# Altium PCB AlexaGoogleAssistant.PcbDoc
Units mil, origin at the board's own origin, x right, y up, seen from the top; angles counter-clockwise.
Board outline 3215 x 2894 mil, 2 copper layers (Top Layer, Bottom Layer); 47 components, 46 nets, 183 pads, 15 vias.
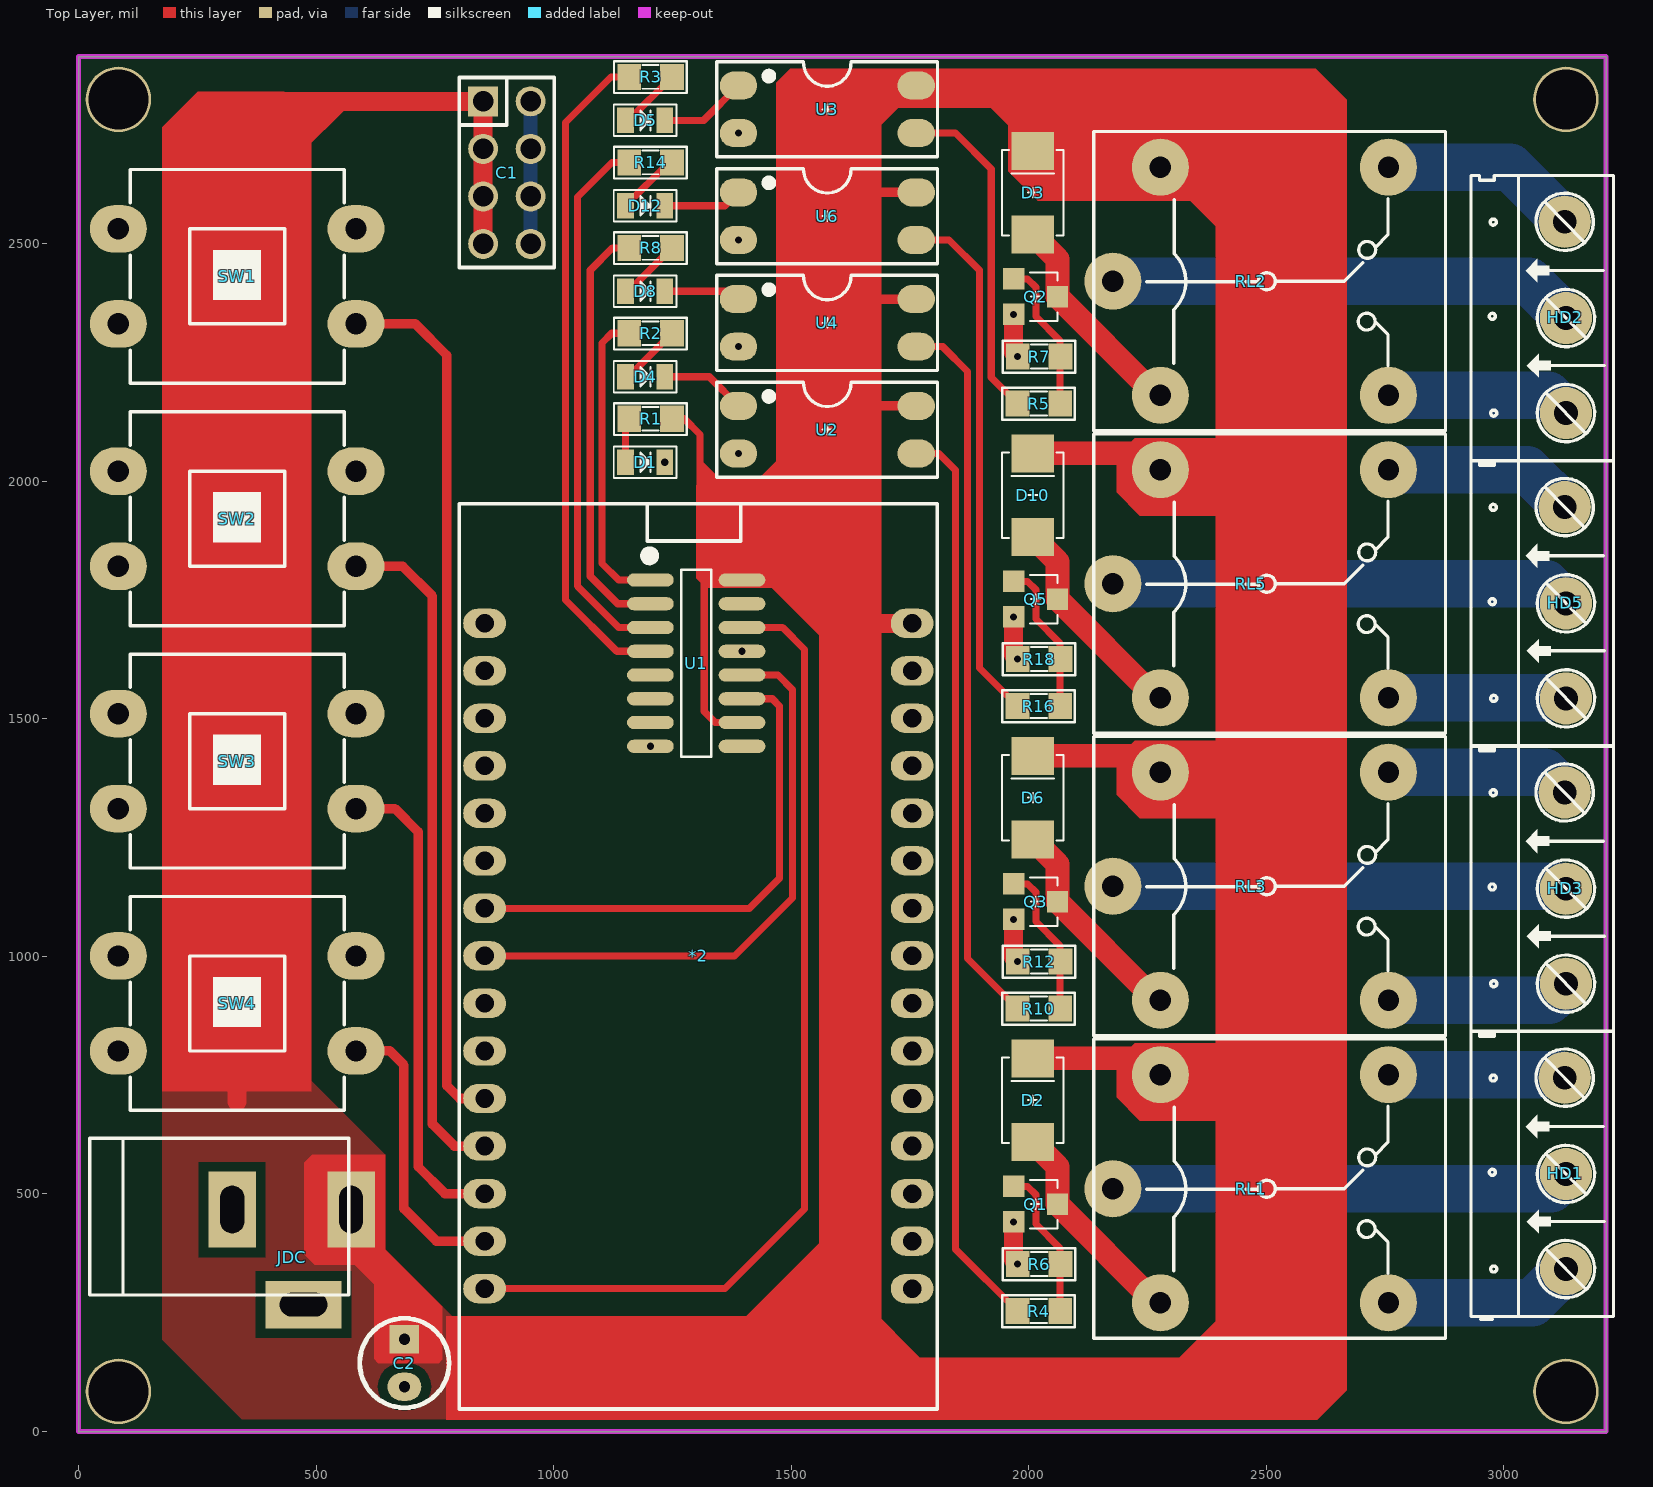
[diagram p0: Top Layer view]
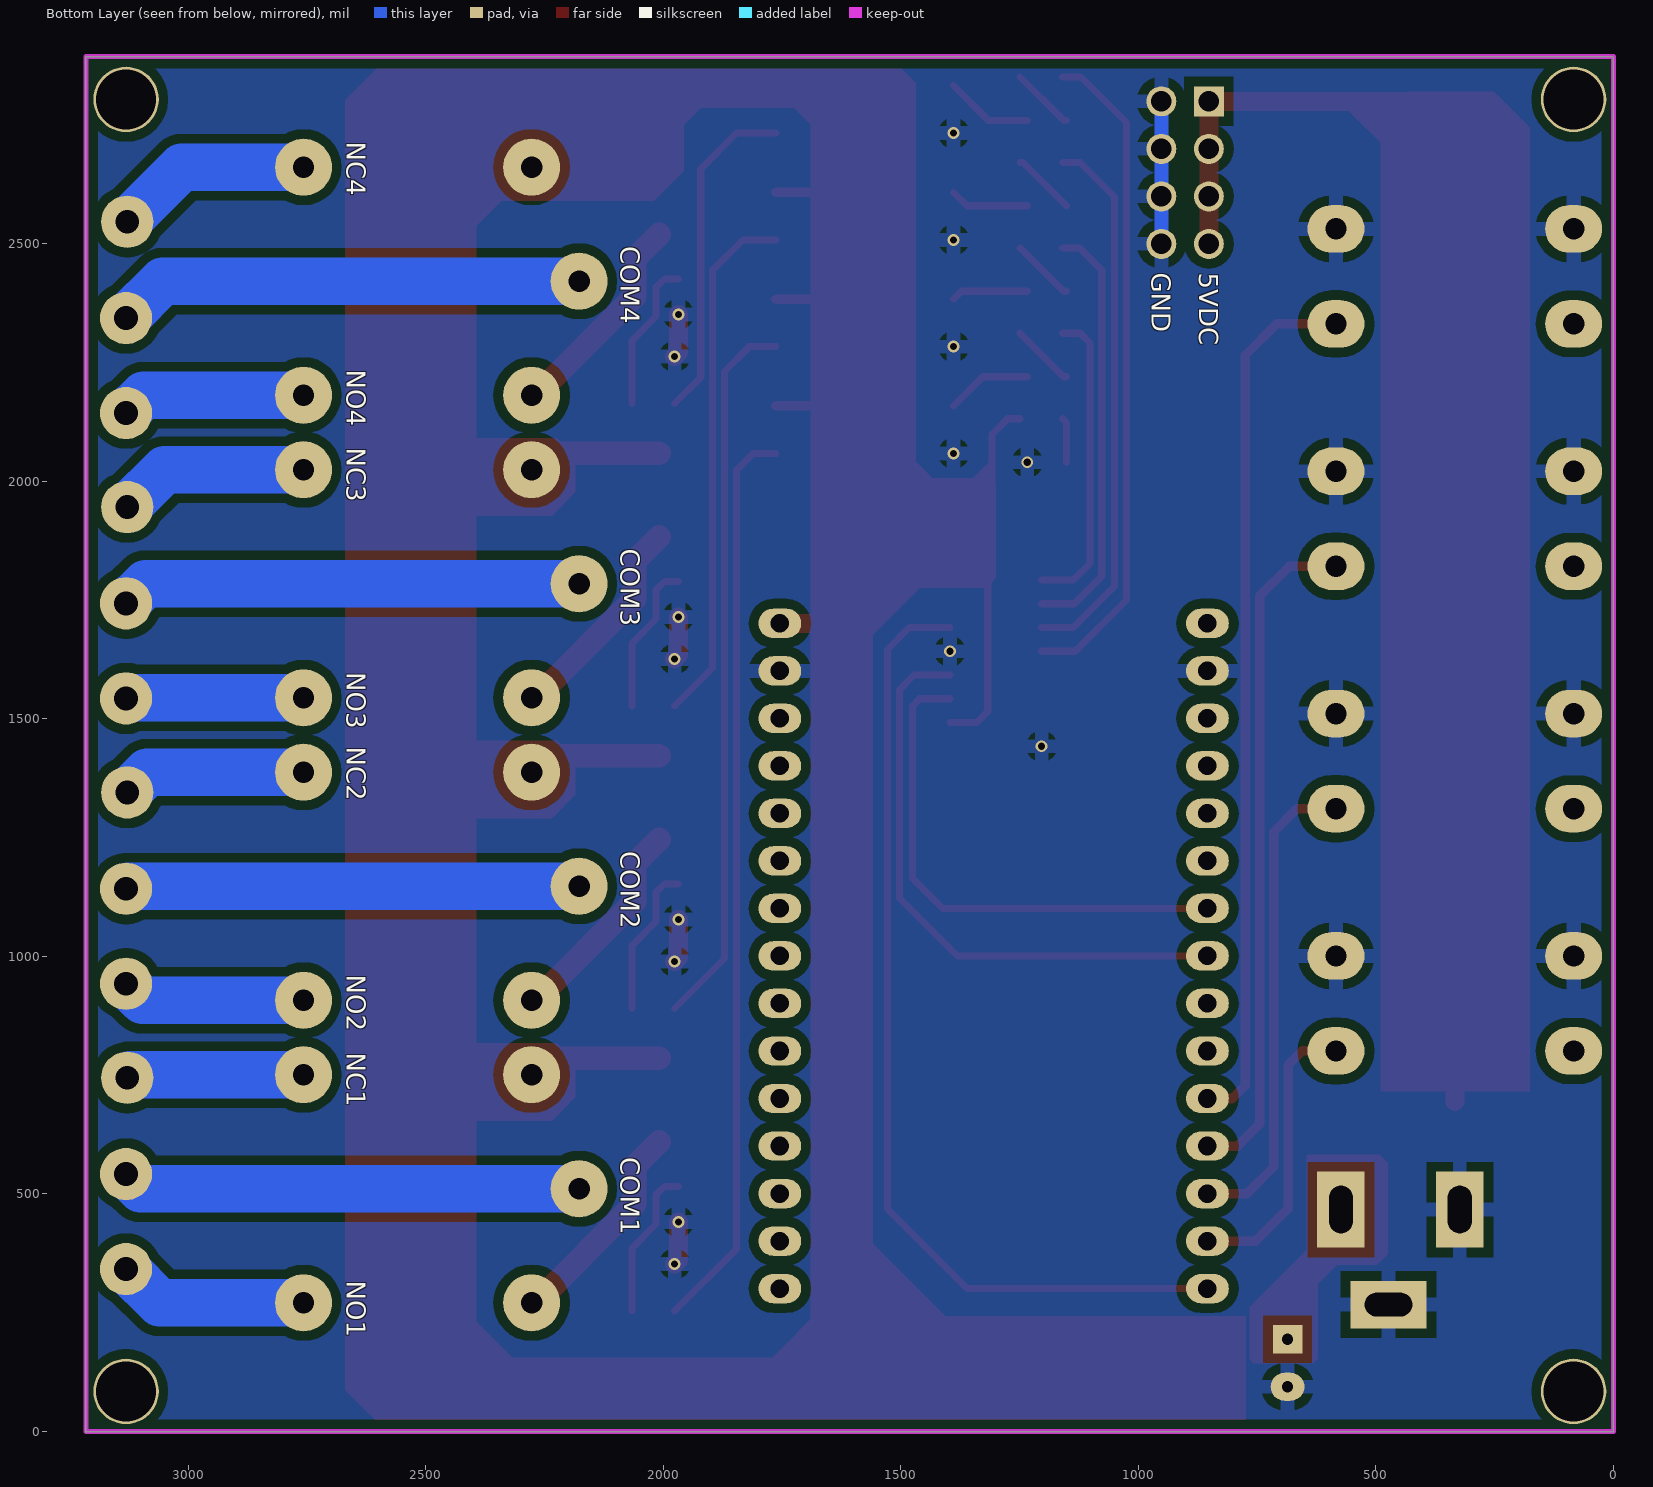
[diagram p1: Bottom Layer view, seen from below]
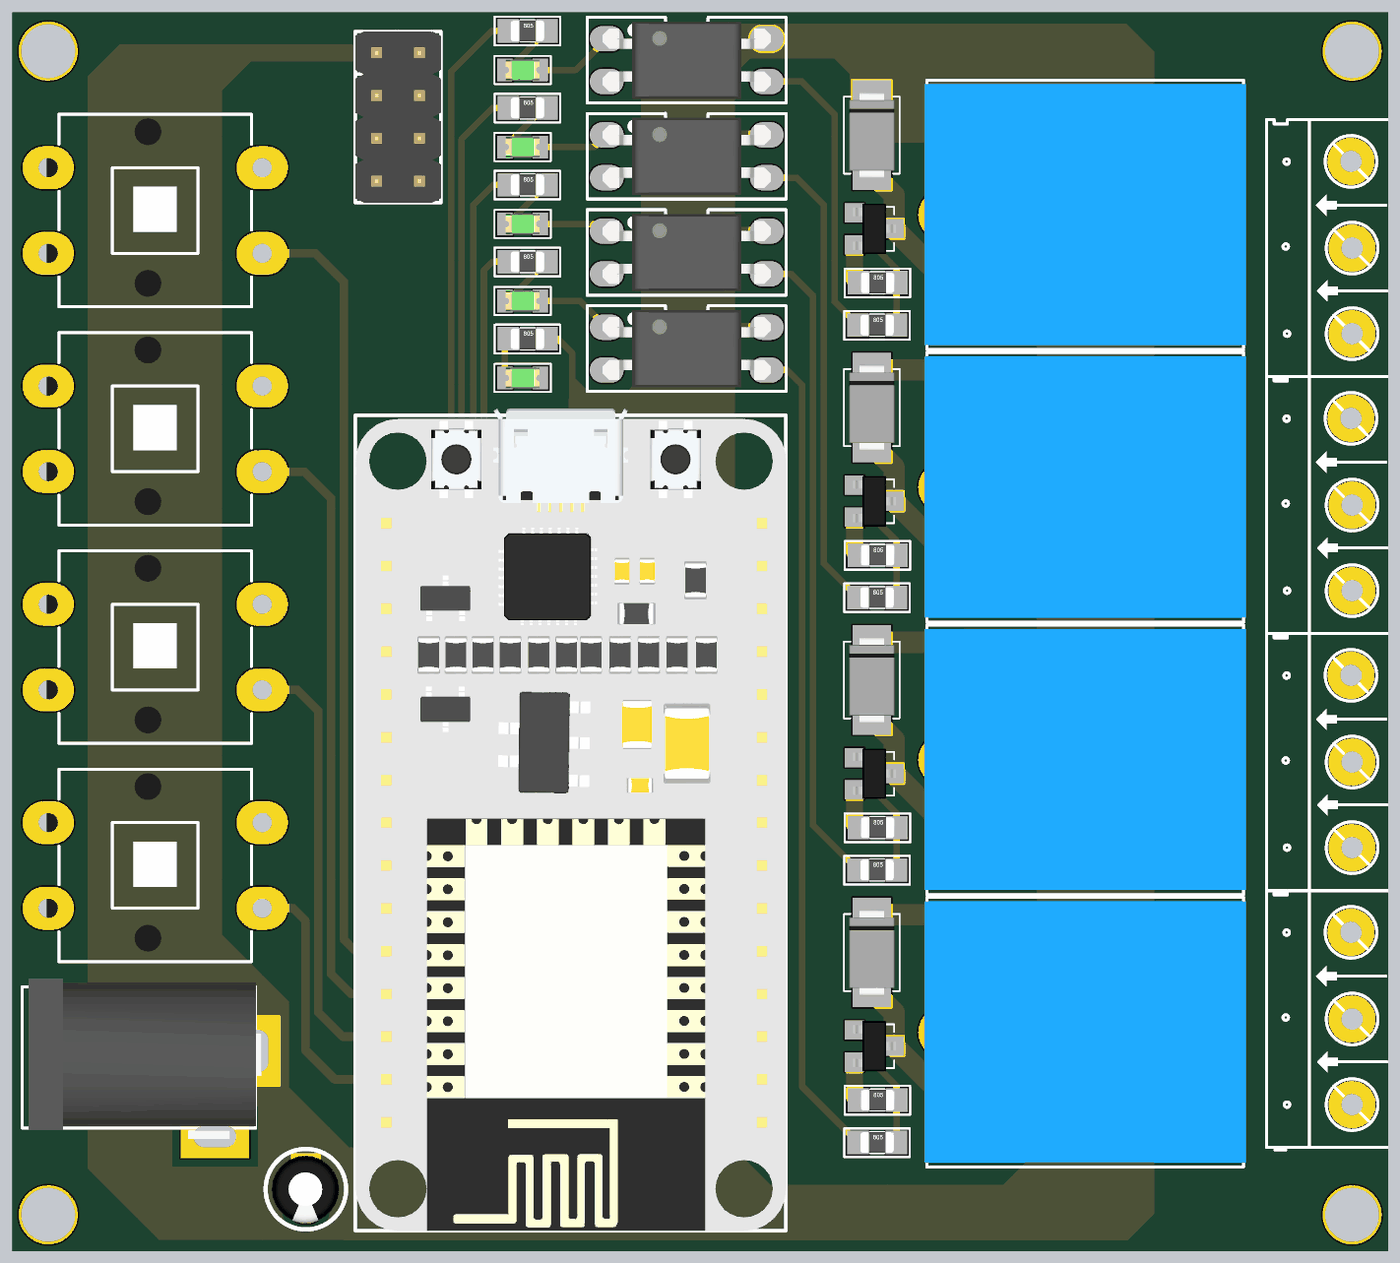
[diagram p2: 3D render of the assembled board from above, using the file's embedded part models]

## Layer stack, top to bottom
Top Solder: solder mask 0.4, Solder Resist, Dk 3.5
Top Layer: signal copper 1.4
Dielectric 1: dielectric 12.6, FR-4, Dk 4.8
Bottom Layer: signal copper 1.4
Bottom Solder: solder mask 0.4, Solder Resist, Dk 3.5

## Board outline
0,0 0,2894 3215,2894 3215,0

## Design rules (kind name [scope] priority, off if disabled: settings)
Clearance [All] p1: gap=10 ignorepadtopadclearanceinfootprint=FALSE except(0: Arc-Hole Track-Hole SMDPad-Hole THPad-Hole Via-Hole Fill-Hole Poly-Hole Region-Hole Text-Hole; 20: Arc-Fill Arc-Poly Arc-Region Track-Fill Track-Poly Track-Region SMDPad-Fill SMDPad-Poly SMDPad-Region THPad-Fill THPad-Poly THPad-Region Via-Fill Via-Poly Via-Region Fill-Fill Fill-Poly Fill-Region Poly-Poly Poly-Region Region-Region)
PlaneConnect [All] p1: planeconnectstyle=Relief reliefexpansion=20 reliefentries=4 reliefconductorwidth=30 reliefairgap=20
PolygonConnect [All] p1: connectstyle=Relief reliefconductorwidth=30 reliefentries=4 polygonreliefangle="90 Angle" airgapwidth=20
RoutingVias [All] p1: holewidth=28 width=50 viastyle="Through Hole" minholewidth=28 minwidth=50 maxholewidth=28 maxwidth=50
SolderMaskExpansion [All] p1: expansion=4
Width [All] p1: maxlimit=200 minlimit=10 preferedwidth=10
29 further rules are at their usual default settings.

## Components (designator, comment, footprint, x,y, rotation, side; value= is the part's Value field where it differs from the comment)
*2 "Module ESP8266 CP2102" "Module ESP8266 CP2102" 799.5,42.95 r0 top
C1 "JP4x2" JP4-D2T 901.5,2649.73 r270 top
C2 "10uF" CA-ALU-2.54 686,144.25 r270 top value=104
D1 "LED" LED_SMD_0805 1192.5,2040.1 r0 top
D2 "DIODE" "DO 214AC" 2008.5,697.5 r90 top
D3 "DIODE" "DO 214AC" 2008.5,2607.54 r90 top
D4 "LED" LED_SMD_0805 1192.5,2220 r0 top
D5 "LED" LED_SMD_0805 1192.5,2759.72 r0 top
D6 "DIODE" "DO 214AC" 2008.5,1334.18 r90 top
D8 "LED" LED_SMD_0805 1192.5,2399.91 r0 top
D10 "DIODE" "DO 214AC" 2008.5,1970.86 r90 top
D12 "LED" LED_SMD_0805 1192.5,2579.81 r0 top
HD1 "Header 3" HED3 3130.62,342 r90 top
HD2 "Header 3" HED3 3130.62,2143.57 r90 top
HD3 "Header 3" HED3 3130.62,942.52 r90 top
HD5 "Header 3" HED3 3130.62,1543.05 r90 top
JDC "Jac DC" DC-IN 448.5,367.25 r0 top
Q1 "C1815" SOT23 2014.26,478.6 r270 top
Q2 "C1815" SOT23 2014.26,2388.64 r270 top
Q3 "C1815" SOT23 2014.26,1115.28 r270 top
Q5 "C1815" SOT23 2014.26,1751.96 r270 top
R1 "470R" SM-RES-0805 1159,2131.55 r0 top value="R1/4W - 1K"
R2 "220R" SM-RES-0805 1159,2311.46 r0 top value="R1/4W - 1K"
R3 "220R" SM-RES-0805 1159,2851.17 r0 top value="R1/4W - 1K"
R4 "470R" SM-RES-0805 1976,253.6 r0 top value="R1/4W - 1K"
R5 "470R" SM-RES-0805 1976,2163.64 r0 top value="R1/4W - 1K"
R6 "10K" SM-RES-0805 1977,352.6 r0 top value="R1/4W - 1K"
R7 "10K" SM-RES-0805 1977,2262.64 r0 top value="R1/4W - 1K"
R8 "220R" SM-RES-0805 1159,2491.36 r0 top value="R1/4W - 1K"
R10 "470R" SM-RES-0805 1976,890.28 r0 top value="R1/4W - 1K"
R12 "10K" SM-RES-0805 1977,989.28 r0 top value="R1/4W - 1K"
R14 "220R" SM-RES-0805 1159,2671.26 r0 top value="R1/4W - 1K"
R16 "470R" SM-RES-0805 1976,1526.96 r0 top value="R1/4W - 1K"
R18 "10K" SM-RES-0805 1977,1625.96 r0 top value="R1/4W - 1K"
RL1 "Relay 10A/5V" RL_SPDT_10A 2177,511 r0 top value="Relay SPDT, 10A, 12V"
RL2 "Relay 10A/5V" RL_SPDT_10A 2177,2421.04 r0 top value="Relay SPDT, 10A, 12V"
RL3 "Relay 10A/5V" RL_SPDT_10A 2177,1147.68 r0 top value="Relay SPDT, 10A, 12V"
RL5 "Relay 10A/5V" RL_SPDT_10A 2177,1784.36 r0 top value="Relay SPDT, 10A, 12V"
SW1 "SW" SW4B 84,2331.25 r0 top value="Button chip 4 pin"
SW2 "SW" SW4B 84,1821.15 r0 top value="Button chip 4 pin"
SW3 "SW" SW4B 84,1311.05 r0 top value="Button chip 4 pin"
SW4 "SW" SW4B 84,800.95 r0 top value="Button chip 4 pin"
U1 "74HC595" SO-16-M 1300,1617.25 r270 top
U2 "PC817" PC817 1576,2108.6 r0 top
U3 "PC817" PC817 1576,2782.79 r0 top
U4 "PC817" PC817 1576,2333.33 r0 top
U6 "PC817" PC817 1576,2558.06 r0 top

## Footprints (in the part's own frame and the unit in brackets; to place one, negate y for a bottom-side part, rotate by r counter-clockwise, add the part's x,y. Pads: shape width x height; smd on the part's side, far side on the other; paste and mask are expansions set on the pad)
CA-ALU-2.54 [mm]
  rect 1.5x1.58 hole 0.6: 1(-1.27,0)
  oval 1.5x1.8 hole 0.6: 2(1.27,0)
  silkscreen extent -2.39,-2.39 2.39,2.39, body extent -2,-2.03 1.99,1.97, height 7.01
DC-IN [mil] "Jac DC input"
  rect 100x160 hole 50 slot 100 at 90 deg: 1(125,100) 2(-125,100)
  rect 160x100 hole 50 slot 100 at 0 deg: 3(25,-100)
  silkscreen extent -425,-80 120,250, body extent -410,-105 134,269, height 434
"DO 214AC" [mil]
  rect 80x90 smd: 1(-88,0) 2(88,0)
  silkscreen extent -90,-65 90,65, body extent -101,-53 100,52, height 85
HED3 [mil] "Header 3, 3 pin, hight 300mil, Pin to Pin 200, Colour Green"
  round 110 hole 50: 1(0,0) 2(200,0) 3(402.62,2.62)
  silkscreen extent -106,-100 500,200
JP4-D2T [mm] "8 pins, dual pin, straight, gold plating"
  rect 1.61x1.6 hole 1.1: 1(-3.81,-1.27)
  oval 1.61x1.6 hole 1.1: 2(-1.27,-1.27) 3(1.27,-1.27) 4(3.81,-1.27) 5(3.81,1.27) 6(1.27,1.27) 7(-1.27,1.27) 8(-3.81,1.27)
  silkscreen extent -5.08,-2.54 5.08,2.54, body extent -5.08,-2.54 5.08,2.54, height 8.55
LED_SMD_0805 [mm]
  rect 0.9x1.35 smd: 1(-1.05,0) 2(1.05,0)
  silkscreen extent -1.68,-0.84 1.68,0.84, body extent -1.01,-0.62 1.01,0.63, height 1.1
"Module ESP8266 CP2102" [mil]
  oval 90x62 hole 39: 1(55,1658) 2(55,1558) 3(55,1458) 4(55,1358) 5(55,1258) 6(55,1158) 7(55,1058) 8(55,958) 9(55,858) 10(55,758) 11(55,658) 12(55,558) 13(55,458) 14(55,358) 15(55,258) 16(955,1658) 17(955,1558) 18(955,1458) 19(955,1358) 20(955,1258) 21(955,1158) 22(955,1058) 23(955,958) 24(955,858) 25(955,758) 26(955,658) 27(955,558) 28(955,458) 29(955,358) 30(955,258)
  silkscreen extent 2,4 1008,1910, body extent 3,4 1009,1926, height 311
PC817 [mm]
  oval 2x1.5 smd: 1(-4.75,1.27) 2(-4.75,-1.27) 3(4.75,-1.27) 4(4.75,1.27)
  silkscreen extent -5.91,-2.54 5.89,2.55, body extent -5,-2.29 5,2.29, height 3.85
RL_SPDT_10A [mil] "Relay SPDT, 5 pin, 10A,W 650mil, L 800mil, H 800mil"
  round 120 hole 45: 1(0,0) 2(580,240) 3(580,-240) 4(100,-240) 5(100,240)
  silkscreen extent -40,-315 700,315, body extent -46,-304 706,306, height 602
SM-RES-0805 [mil]
  rect 50x55 smd: 1(0,0) 2(90,0)
  silkscreen extent -32,-34 121,33, body extent 6,-25 84,25, height 31
SO-16-M [mm] "74HC595;SOIC, 16-Leads, Body 9.9x3.9mm, Pitch 1.27mm, IPC Low Density"
  oval 0.7x2.5 smd: 1(-4.445,-2.45) 2(-3.175,-2.45) 3(-1.905,-2.45) 4(-0.635,-2.45) 5(0.635,-2.45) 6(1.905,-2.45) 7(3.175,-2.45) 8(4.445,-2.45) 9(4.445,2.45) 10(3.175,2.45) 11(1.905,2.45) 12(0.635,2.45) 13(-0.635,2.45) 14(-1.905,2.45) 15(-3.175,2.45) 16(-4.445,2.45)
  silkscreen extent -5.99,-2.74 5,0.8, body extent -5,-2.97 5,3.23, height 1.73
SOT23 [mil]
  rect 45x45 smd: 1(-37.4,-46.26) 2(37.4,-46.26) 3(0,46.26)
  silkscreen extent -51,-12 51,46, body extent -59,-50 59,50, height 43
SW4B [mil] "SW button 4pin, 450 x 450 mil"
  oval 120x100 hole 45: 1(0,200) 2(500,0) 3(500,200) 4(0,0)
  silkscreen extent 25,-125 475,325, body extent -3,-129 469,343, height 169

## Part data
C1: "WR-PHD 2.54 mm Dual Socket Header", Manufacturer="Würth Elektronik eiSos GmbH", partNo=61300821821, ComponentLink1 Description=Manufacturer, ComponentLink1URL=http://www.we-online.com, ComponentLink2 Description=Datasheet, ComponentLink2URL=http://katalog.we-online.de/em/datasheet/6130xx21821.pdf, Created by="Karrer Zheng", Created Date="29 March 2013", NoPins=08
C2: library part CN-ALU-DIP, "Capacitor (Semiconductor SIM Model)", LatestRevisionDate=17-Jul-2002, LatestRevisionNote="Re-released for DXP Platform.", PackageReference=C1206, Publisher="Altium Limited"
HD1 HD2 HD3 HD5: library part Hed3, "Header 3 (Green)"
JDC: library part DCIN, "Jac DC input"
R1 R2 R3 R4 R5 R6 R7 R8 R10 R12 R14 R16 R18: library part R1/4W, "Resistor 1/4W"
RL1 RL2 RL3 RL5: library part "Relay 1", "Relay SPDT,10A - 12VDC 5 Pin", ="Relay SPDT, 10A, 24V"
SW1 SW2 SW3 SW4: library part SW4, "Switch button 4 pin"

## Free pads (board coordinates)
  round 137.8 hole 125.98: 9(84,84.42) 9(84,2803.77) 9(3130.62,84.42) 9(3130.62,2803.77)

## Via types
v1: diameter 25, hole 15, Top Layer to Bottom Layer, tented both sides, 15 vias

## Nets (pads, with @x,y where several pads share a name; then routed paths per layer and width w, separated by ;. In a path a pad name is that pad's centre, name@x,y a point inside that pad or via, vN(x,y) a via of type N, cw(c..) or ccw(c..) an arc to the next point about the centre after c; other vN are vias at no path point)
5VDC: *2.16 C1.1 C1.2 C1.3 C1.4 C2.1 D2.2 D3.2 D6.2 D10.2 JDC.1 R1.2 RL1.5 RL2.5 RL3.5 RL5.5 U1.10 U1.16 U2.4 U3.4 U4.4 U6.4 | length 4714.2
  Top Layer w15: R1.2 1274.7,2131.55 1308,2098.25 1308,1979.25 ; 1317,1812.25 1317,1515.25 1340,1492.25 U1.10
  Top Layer w20: 1650.35,2158.6 U2.4 ; 1659.08,2383.33 U4.4 ; 1666.81,2608.06 U6.4
  Top Layer w40: 334,694.25 334,2715.25 418.48,2799.73 C1.1 C1.2 C1.3 C1.4 ; 1652.7,1700.95 *2.16
  Top Layer w50: D2.2 2242.5,785.5 RL1.5 ; D6.2 2242.5,1422.18 RL3.5 ; D10.2 2242.5,2058.86 RL5.5
GND: *2.2 *2.17 C1.5 C1.6 C1.7 C1.8 C2.2 D1.2 JDC.2 JDC.3 Q1.2 Q2.2 Q3.2 Q5.2 R6.1 R7.1 R12.1 R18.1 SW1.1 SW1.3 SW2.1 SW2.3 SW3.1 SW3.3 SW4.1 SW4.3 U1.8 U1.13 U2.2 U3.2 U4.2 U6.2 | length 667.6
  Top Layer w40: v1(1968,441.2) 1968,360.6 v1(1976,352.6) ; v1(1968,1077.88) 1968,997.28 v1(1976,989.28) ; v1(1968,1714.56) 1968,1633.96 v1(1976,1625.96) ; v1(1968,2351.24) 1968,2270.64 v1(1976,2262.64)
  Bottom Layer w30: C1.5 C1.6 C1.7 C1.8
  other v1: 1203.54,1442.25 1396.46,1642.25 1233.84,2040.1 1389,2058.6 1389,2283.33 1389,2508.06 1389,2732.79
LATCH: *2.8 U1.12 | length 1256.5
  Top Layer w15: *2.8 1380.7,1000.95 1503,1123.25 1503,1561.25 1472,1592.25 U1.12
NetD1_1: D1.1 R1.1 | length 94.7
  Top Layer w15: D1.1 1151.16,2123.71 R1.1
NetD2_1: D2.1 Q1.3 RL1.4 | length 454.9
  Top Layer w50: D2.1 2060.52,557.48 Q1.3 2268.12,271 RL1.4
NetD3_1: D3.1 Q2.3 RL2.4 | length 454.9
  Top Layer w50: D3.1 2060.52,2467.52 Q2.3 2268.12,2181.04 RL2.4
NetD4_1: D4.1 R2.2 | length 135.7
  Top Layer w15: D4.1 1157.55,2220 R2.2
NetD4_2: D4.2 U2.1 | length 180.6
  Top Layer w15: D4.2 1327.59,2220 U2.1
NetD5_1: D5.1 R3.2 | length 135.7
  Top Layer w15: D5.1 1157.55,2759.72 R3.2
NetD5_2: D5.2 U3.1 | length 185.4
  Top Layer w15: D5.2 1315.92,2759.72 U3.1
NetD6_1: D6.1 Q3.3 RL3.4 | length 454.9
  Top Layer w50: D6.1 2060.52,1194.16 Q3.3 2268.12,907.68 RL3.4
NetD8_1: D8.1 R8.2 | length 135.7
  Top Layer w15: D8.1 1157.55,2399.91 R8.2
NetD8_2: D8.2 U4.1 | length 162
  Top Layer w15: D8.2 1372.42,2399.91 U4.1
NetD10_1: D10.1 Q5.3 RL5.4 | length 454.9
  Top Layer w50: D10.1 2060.52,1830.84 Q5.3 2268.12,1544.36 RL5.4
NetD12_1: D12.1 R14.2 | length 135.7
  Top Layer w15: D12.1 1242.61,2671.26 R14.2
NetD12_2: D12.2 U6.1 | length 166.9
  Top Layer w15: D12.2 1360.75,2579.81 U6.1
NetHD1_1: HD1.1 RL1.3 | length 403
  Bottom Layer w100: RL1.3 3059.62,271 HD1.1
NetHD1_2: HD1.2 RL1.1 | length 966.5
  Bottom Layer w100: RL1.1 3099.62,511 HD1.2
NetHD1_3: HD1.3 RL1.2 | length 373.6
  Bottom Layer w100: RL1.2 3121.62,751 HD1.3
NetHD2_1: HD2.1 RL2.3 | length 389.1
  Bottom Layer w100: RL2.3 3093.15,2181.04 HD2.1
NetHD2_2: HD2.2 RL2.1 | length 985.7
  Bottom Layer w100: RL2.1 3053.15,2421.04 HD2.2
NetHD2_3: HD2.3 RL2.2 | length 418.6
  Bottom Layer w100: RL2.2 3013.15,2661.04 HD2.3
NetHD3_1: HD3.1 RL3.3 | length 388.1
  Bottom Layer w100: RL3.3 3095.77,907.68 HD3.1
NetHD3_2: HD3.2 RL3.1 | length 955.8
  Bottom Layer w100: RL3.1 3125.46,1147.68 HD3.2
NetHD3_3: HD3.3 RL3.2 | length 388.6
  Bottom Layer w100: RL3.2 3085.46,1387.68 HD3.3
NetHD5_1: HD5.1 RL5.3 | length 374.2
  Bottom Layer w100: RL5.3 3129.31,1544.36 HD5.1
NetHD5_2: HD5.2 RL5.1 | length 970.7
  Bottom Layer w100: RL5.1 3089.31,1784.36 HD5.2
NetHD5_3: HD5.3 RL5.2 | length 403.6
  Bottom Layer w100: RL5.2 3049.31,2024.36 HD5.3
NetQ1_1: Q1.1 R4.2 R6.2 | length 320.3
  Top Layer w15: Q1.1 1997.6,516 2015.12,498.48 2015.12,436.48 2066,385.6 2066,352.6 R4.2
NetQ2_1: Q2.1 R5.2 R7.2 | length 320.3
  Top Layer w15: Q2.1 1997.6,2426.04 2015.12,2408.52 2015.12,2346.52 2066,2295.64 2066,2262.64 R5.2
NetQ3_1: Q3.1 R10.2 R12.2 | length 320.3
  Top Layer w15: Q3.1 1997.6,1152.68 2015.12,1135.16 2015.12,1073.16 2066,1022.28 2066,989.28 R10.2
NetQ5_1: Q5.1 R16.2 R18.2 | length 320.3
  Top Layer w15: Q5.1 1997.6,1789.36 2015.12,1771.84 2015.12,1709.84 2066,1658.96 2066,1625.96 R16.2
NetR4_1: R4.1 U2.3 | length 1921.1
  Top Layer w15: U2.3 1810.65,2058.6 1846,2023.25 1846,383.6 R4.1
NetR5_1: R5.1 U3.3 | length 705.7
  Top Layer w15: U3.3 1845.46,2732.79 1921,2657.25 1921,2218.64 R5.1
NetR10_1: R10.1 U4.3 | length 1514
  Top Layer w15: U4.3 1818.92,2283.33 1871,2231.25 1871,995.28 R10.1
NetR16_1: R16.1 U6.3 | length 1109.9
  Top Layer w15: U6.3 1832.19,2508.06 1896,2444.25 1896,1606.96 R16.1
NUTNHAN1: *2.11 SW1.2 | length 1846.2
  Top Layer w20: SW1.2 709,2331.25 775,2265.25 775,728.25 802.3,700.95 *2.11
NUTNHAN2: *2.12 SW2.2 | length 1426.7
  Top Layer w20: SW2.2 682.1,1821.15 745,1758.25 745,647.25 791.3,600.95 *2.12
NUTNHAN3: *2.13 SW3.2 | length 1018.9
  Top Layer w20: SW3.2 665.9,1311.05 715,1261.95 715,557.25 771.3,500.95 *2.13
NUTNHAN4: *2.14 SW4.2 | length 613.1
  Top Layer w20: SW4.2 655.3,800.95 685,771.25 685,469.25 753.3,400.95 *2.14
RL1: R2.1 U1.1 | length 645.4
  Top Layer w15: R2.1 1122.21,2311.46 1102,2291.25 1102,1827.25 1137,1792.25 U1.1
RL2: R8.1 U1.2 | length 896.1
  Top Layer w15: R8.1 1124.11,2491.36 1077,2444.25 1077,1800.25 1135,1742.25 U1.2
RL3: R14.1 U1.3 | length 1147.8
  Top Layer w15: R14.1 1123.01,2671.26 1050,2598.25 1050,1779.25 1137,1692.25 U1.3
RL4: R3.1 U1.4 | length 1402
  Top Layer w15: R3.1 1120.92,2851.17 1025,2755.25 1025,1750.25 1133,1642.25 U1.4
SCK: *2.7 U1.11 | length 1094.5
  Top Layer w15: *2.7 1411.7,1100.95 1475,1164.25 1475,1527.25 1460,1542.25 U1.11
SDA: *2.15 U1.14 | length 2071.4
  Top Layer w15: *2.15 1360.7,300.95 1528,468.25 1528,1646.25 1482,1692.25 U1.14
pads on no net: *2.1 *2.3 *2.4 *2.5 *2.6 *2.9 *2.10 *2.18 *2.19 *2.20 *2.21 *2.22 *2.23 *2.24 *2.25 *2.26 *2.27 *2.28 *2.29 *2.30 SW1.4 SW2.4 SW3.4 SW4.4 U1.5 U1.6 U1.7 U1.9 U1.15

## Polygon pours and split planes (outlines as drawn)
5VDC on Top Layer (solid, pour order 10): 176,738.25 176,193.25 344,25.25 774,25.25 834,85.25 834,195.25 646,383.25 646,582.25 490,738.25
no net on Top Layer "phu mass" (solid, pour order 0): 1530,69
GND on Bottom Layer (solid, pour order 12): 0,2894 3215,2894 3215,0 0,0

## Keep-outs
Keep-Out Layer:
  region: 135,4185
  lines w10: 0,0 0,2894 3215,2894 3215,0 0,0

## Other copper
Top Layer:
  region net 5VDC: 2300.5,2629.75 2447.5,2482.75 2447.5,2594.75 2412.5,2629.75
  region net 5VDC: 1915,2791.25 1957,2749.25 1957,2652.25 2019,2590.25 2407,2590.25 2420,2603.25 2420,2759.25 2388,2791.25
  region net 5VDC: 1666,260.25 1771,155.25 2317,155.25 2394,232.25 2394,2680.25 2288,2786.25 1725,2786.25 1725,2799.25 1794,2868.25 2604,2868.25 2669,2803.25 2669,87.25 2607,25.25 1503,25.25 1503,97.25
  region net 5VDC: 1308,2047.36 1358,1997.36 1358,1957.25 1308,2007.25
  region net 5VDC: 774,242.25 1405,242.25 1559,396.25 1559,1676.25 1459,1776.25 1320,1776.25 1300,1796.25 1300,1991.25 1315,2006.25 1433.1,2006.25 1469,2042.15 1469,2839.25 1498,2868.25 1794,2868.25 1808,2854.25 1808,2815.25 1779,2786.25 1725,2786.25 1689,2750.25 1689,182.25 1532,25.25 774,25.25
  region net 5VDC: 593.5,2815.75 440.5,2662.75 440.5,2815.75
  region net 5VDC: 176,716.25 176,2745.25 251,2820.25 433,2820.25 490,2763.25 490,716.25
  region net 5VDC: 492,582.25 475,565.25 475,373.25 497,351.25 581,351.25 622,310.25 622,153.25 631.05,144.2 757.95,144.2 766,152.25 766,262.25 646,382.25 646,582.25
  region net 5VDC: 281,534
  region net 5VDC: 2437,817.6 2223,817.6 2185,779.6 2185,703.6 2234,654.6 2414.5,654.6 2437,677.1
  region net 5VDC: 2437,1454.28 2223,1454.28 2185,1416.28 2185,1340.28 2234,1291.28 2414.5,1291.28 2437,1313.78
  region net 5VDC: 2437,2090.96 2223,2090.96 2185,2052.96 2185,1976.96 2234,1927.96 2414.5,1927.96 2437,1950.46

## Silkscreen, mask and mechanical layers (free items; w line width, h text height)
Bottom Overlay:
  text "NC4" at 2666,2714.35 h40 r90
  text "COM4" at 2089,2494.35 h40 r90
  text "5VDC" at 871.5,2439.25 h40 r90
  text "GND" at 971.5,2439.25 h40 r90
  text "NO4" at 2666,2234.35 h40 r90
  text "NC3" at 2666,2071.01 h40 r90
  text "COM3" at 2089,1857.67 h40 r90
  text "NO3" at 2666,1597.68 h40 r90
  text "NC2" at 2666,1441 h40 r90
  text "COM2" at 2089,1220.99 h40 r90
  text "NO2" at 2666,961 h40 r90
  text "NC1" at 2666,797.65 h40 r90
  text "COM1" at 2089,577.65 h40 r90
  text "NO1" at 2666,317.65 h40 r90
Bottom Solder:
  lines w80: 2177,511 3099.62,511 3130.62,542 ; 2177,1147.68 3125.46,1147.68 3130.62,1142.52 ; 2177,1784.36 3089.31,1784.36 3130.62,1743.05 ; 2177,2421.04 3053.15,2421.04 3130.62,2343.57 ; 2757,271 3059.62,271 3130.62,342 ; 2757,751 3121.62,751 3128,744.62 ; 2757,907.68 3095.77,907.68 3130.62,942.52 ; 2757,1387.68 3085.46,1387.68 3128,1345.14 ; 2757,1544.36 3129.31,1544.36 ; 2757,2024.36 3049.31,2024.36 3128,1945.67 ; 2757,2181.04 3093.15,2181.04 3130.62,2143.57 ; 2757,2661.04 3013.15,2661.04 3128,2546.19